# EAGLE board final board v1.0 (EAGLE 9.4.0)
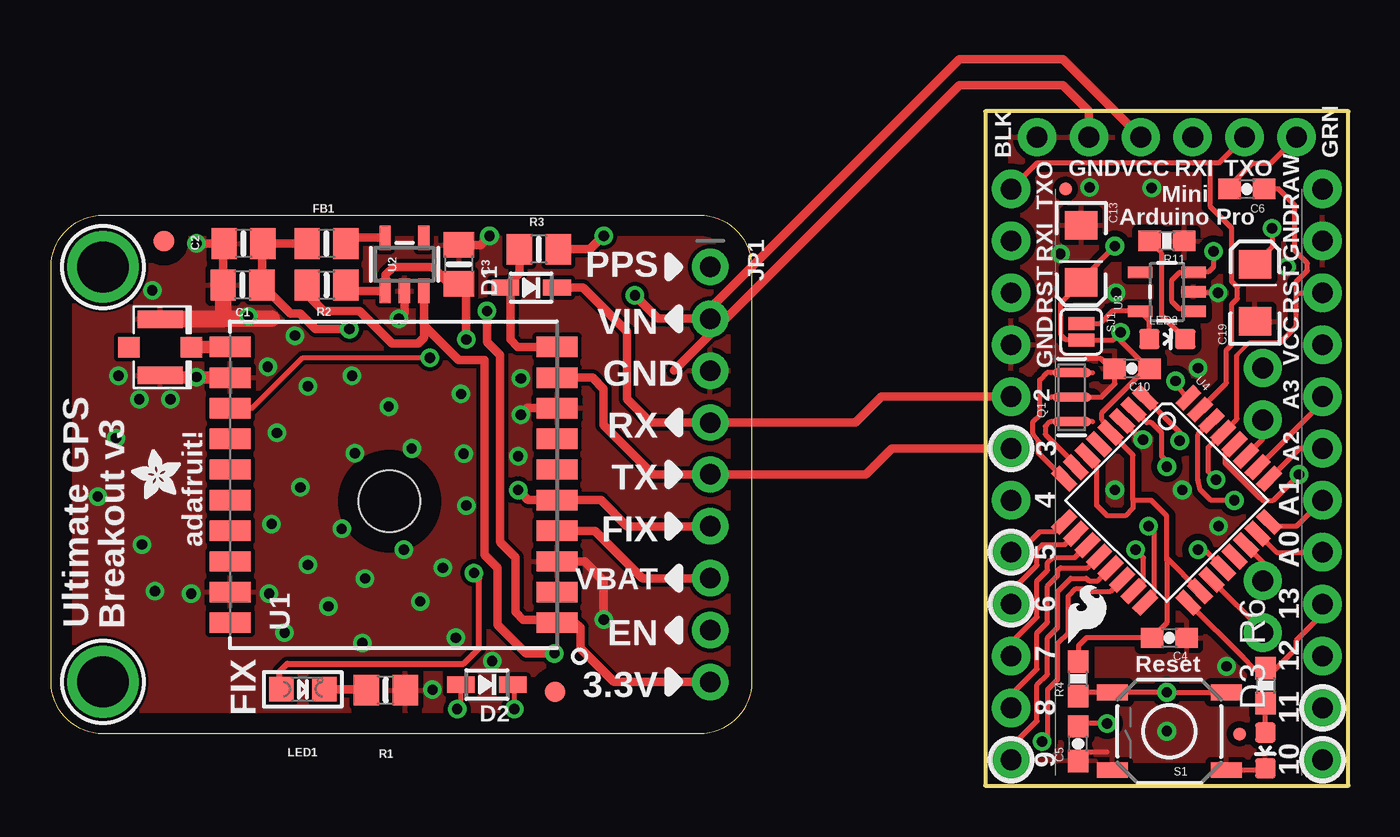
[diagram p0: board, top side]
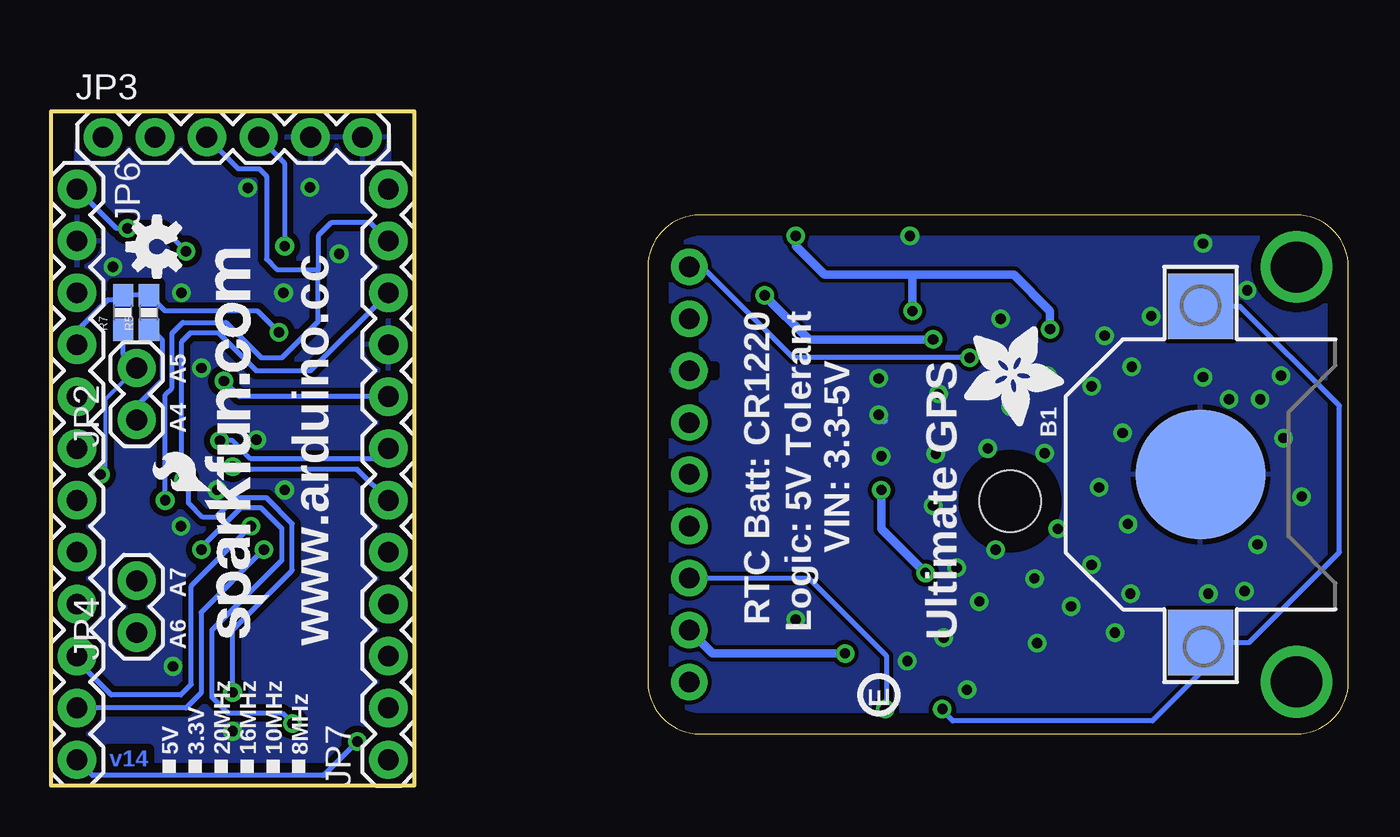
[diagram p1: board, bottom side, seen from below]

Size 63.5 x 33.02 mm. Coordinates in mm from the lower left corner, seen from the top.
Outline: 31.75,2.54 2.54,2.54 arc-90 0,5.08 0,25.4 arc-90 2.54,27.94 31.75,27.94 arc-90 34.29,25.4 34.29,5.08 arc-90 31.75,2.54
Outline: 45.72,33.02 45.72,0 63.5,0 63.5,33.02 45.72,33.02
Copper layers (1*16): Top 0.035mm / dielectric 1.5mm / Bottom 0.035mm
Design rules "default": minimum track width 6mil, minimum drill 0.35mm, track to track 6mil, track to pad 6mil, pad to pad 6mil, via to via 6mil, smd to smd 6mil, copper to edge 40mil, drill to drill 6mil, minimum pad ring 10mil, minimum via ring 8mil, stop-mask expansion 4mil, vias tented up to drill 0mil, thermal gap 10mil
Net classes: 1 vcc: width 0.254 mm
bRestrict: area 31,20.1 to 31.1,20.6; area 32,19 to 32.5,19.2; area 32,21.5 to 32.5,21.6

## Footprints (pad centres in the part's own frame; a part is rotated, then mirrored left to right if it is on the bottom)
CR1220 = smd 3.2 x 3.2: +$1 -8.225,0; +$2 8.225,0 | smd 6.35 x 6.35: - 0,0
0805-NO = smd 1.24 x 1.5: 1 -0.95,0; 2 0.95,0
0603-CAP = smd 1.1 x 1: 1 -0.85,0; 2 0.85,0
EIA3216 = smd 1.4 x 1.6: A 1.4,0; C -1.4,0
SOD-323 = smd 1.35 x 0.8: A 1.27,0; C -1.27,0
0603-LED-ALT1 = smd 1 x 1: A 0,-0.877; C 0,0.877
FIDUCIAL_1MM = smd 1 x 1: 1 0,0
1X09_ROUND_70 = drill 1 pad 1.778: 1 -10.16,0; 2 -7.62,0; 3 -5.08,0; 4 -2.54,0; 5 0,0; 6 2.54,0; 7 5.08,0; 8 7.62,0; 9 10.16,0
1X02 = drill 1.016 pad 1.88: 1 0,0; 2 2.54,0
1X06 = drill 1.016 pad 1.88: 1 0,0; 2 2.54,0; 3 5.08,0; 4 7.62,0; 5 10.16,0; 6 12.7,0
MICRO-FIDUCIAL = smd 0.635 x 0.635: 1 0,0
1X12 = drill 1.016 pad 1.88: 1 0,0; 2 2.54,0; 3 5.08,0; 4 7.62,0; 5 10.16,0; 6 12.7,0; 7 15.24,0; 8 17.78,0; 9 20.32,0; 10 22.86,0; 11 25.4,0; 12 27.94,0
CHIPLED_0805 = smd 1.2 x 1.2: A 0,-1.05; C 0,1.05
RESONATOR-SMD-1:1 = smd 0.45 x 1.905: 1 -1.2,0; 2 0,0; 3 1.2,0
0603-RES = smd 1.1 x 1: 1 -0.85,0; 2 0.85,0
TACTILE-SWITCH-SMD-ALT01 = smd 1.524 x 0.762: 1 -2.794,1.905; 2 2.794,1.905; 3 -2.794,-1.905; 4 2.794,-1.905
SJ_2S = smd 0.635 x 1.27: 1 -0.412,0; 2 0.412,0
FGPMMOPA6H = smd 2 x 1: P$1 -8,6.75; P$2 -8,5.25; P$3 -8,3.75; P$4 -8,2.25; P$5 -8,0.75; P$6 -8,-0.75; P$7 -8,-2.25; P$8 -8,-3.75; P$9 -8,-5.25; P$10 -8,-6.75; P$11 8,-6.75; P$12 8,-5.25; P$13 8,-3.75; P$14 8,-2.25; P$15 8,-0.75; P$16 8,0.75; P$17 8,2.25; P$18 8,3.75; P$19 8,5.25; P$20 8,6.75 | hole 3: 0.2,0.8
SOT23-5 = smd 0.55 x 1.2: 1 -0.95,-1.3; 2 0,-1.3; 3 0.95,-1.3; 4 0.95,1.3; 5 -0.95,1.3
TQFP32-08 = smd 1.27 x 0.559: 1 -4.293,2.8; 2 -4.293,2; 3 -4.293,1.2; 4 -4.293,0.4; 5 -4.293,-0.4; 6 -4.293,-1.2; 7 -4.293,-2; 8 -4.293,-2.8; 17 4.293,-2.8; 18 4.293,-2; 19 4.293,-1.2; 20 4.293,-0.4; 21 4.293,0.4; 22 4.293,1.2; 23 4.293,2; 24 4.293,2.8 | smd 0.559 x 1.27: 9 -2.8,-4.293; 10 -2,-4.293; 11 -1.2,-4.293; 12 -0.4,-4.293; 13 0.4,-4.293; 14 1.2,-4.293; 15 2,-4.293; 16 2.8,-4.293; 25 2.8,4.293; 26 2,4.293; 27 1.2,4.293; 28 0.4,4.293; 29 -0.4,4.293; 30 -1.2,4.293; 31 -2,4.293; 32 -2.8,4.293
MOUNTINGHOLE_2.5_PLATED = drill 2.5 pad 3.2: P$1 0,0
U.FL = smd 2.2 x 0.85: P$1 0,1.375; P$2 0,-1.375 | smd 1.05 x 1: P$3 1.525,0; P$4 -1.525,0

## Placement (x,y rotation side)
B1  CR1220  [CR1220]  7.24,15.24 270 bottom
C1  0.1uF  [0805-NO]  9.37,24.51 180 top
C2  10uF  [0805-NO]  9.42,26.54 180 top
C3  10uF  [0805-NO]  19.96,25.53 90 top
C4  0.1uF  [0603-CAP]  54.74,7.24 180 top
C5  0.1uF  [0603-CAP]  50.27,2.06 90 top
C6  0.1uF  [0603-CAP]  58.52,29.21 180 top
C10  0.1uF  [0603-CAP]  52.91,20.42 180 top
C13  10uF  [EIA3216]  50.42,26.03 270 top
C19  10uF  [EIA3216]  58.93,24.13 90 top
D1  1N4148  [SOD-323]  23.5,24.38 180 top
D2  CUS520  [SOD-323]  21.34,4.95 180 top
D3  Green  [0603-LED-ALT1]  59.44,1.73 180 top
FB1  Ferrite  [0805-NO]  13.49,26.54 180 top
FID1  FIDUCIAL""  [FIDUCIAL_1MM]  5.52,26.67 90 top
FID2  FIDUCIAL""  [FIDUCIAL_1MM]  24.66,4.59 90 top
JP1  [1X09_ROUND_70]  32.26,15.24 270 top
JP2  [1X02]  59.31,17.91 90 bottom
JP3  FTDI Basic  [1X06]  60.96,31.75 0 bottom
JP4  [1X02]  59.31,7.49 90 bottom
JP5  FIDUCIALUFIDUCIAL  [MICRO-FIDUCIAL]  49.66,29.21 0 top
JP6  [1X12]  62.23,29.21 270 bottom
JP7  [1X12]  46.99,1.27 90 bottom
JP8  FIDUCIALUFIDUCIAL  [MICRO-FIDUCIAL]  58.17,2.54 0 top
LED1  RED  [CHIPLED_0805]  12.32,4.72 270 top
LED2  Red  [0603-LED-ALT1]  54.64,21.87 270 top
Q1  8/16/20MHz  [RESONATOR-SMD-1:1]  49.96,19.02 90 top
R1  1K  [0805-NO]  16.38,4.68 180 top
R2  10K  [0805-NO]  13.49,24.51 0 top
R3  10K  [0805-NO]  23.88,26.27 180 top
R4  10K  [0603-RES]  50.27,5.23 90 top
R5  [0603-RES]  58.7,23.16 90 bottom
R6  330  [0603-RES]  59.44,4.9 270 top
R7  [0603-RES]  59.97,23.16 90 bottom
R11  10K  [0603-RES]  54.61,26.67 180 top
S1  Reset  [TACTILE-SWITCH-SMD-ALT01]  54.74,2.67 180 top
SJ1  [SJ_2S]  50.42,22.23 270 top
U1  FGPMMOPA6H  [FGPMMOPA6H]  16.76,14.73 180 top
U2  MIC5225-3.3  [SOT23-5]  17.3,25.53 0 top
U3  MIC5205  [SOT23-5]  54.61,24.18 90 top
U4  ATMEGA328  [TQFP32-08]  54.61,13.97 315 top
U$1  LOGO-SFESK  [SFE-LOGO-FLAME]  49.78,6.98 0 top
U$3  OSHW-LOGOS  [OSHW-LOGO-S]  58.32,26.39 90 bottom
U$8  MOUNTINGHOLE2.5  [MOUNTINGHOLE_2.5_PLATED]  2.54,5.08 90 top
U$9  MOUNTINGHOLE2.5  [MOUNTINGHOLE_2.5_PLATED]  2.54,25.4 90 top
U$11  LOGO-SFENEW  [SFE-NEW-WEBLOGO]  52.83,7.24 90 bottom
U$15  [ADAFRUIT_2.5MM]  6.35,14.03 90 top
U$16  [PCBFEAT-REV-040]  22.99,4.45 270 bottom
U$18  [ADAFRUIT_5MM]  18.8,22.48 270 bottom
U$20  U.FL  [U.FL]  5.33,21.46 0 top

## Library data of the parts
B1 C1-C3 D1 D2 FB1 JP1 LED1 R1-R3 U1 U2 U$15 U$18 U$20 = microbuilder
C4-C6 C10 C13 C19 JP2-JP8 R4-R7 R11 U3 U4 U$1 U$3 U$11 = SparkFun
D3 LED2 Q1 S1 = Testing
FID1 FID2 U$8 U$9 = microbuilder; BOM: EXCLUDE
SJ1 = SparkFun-Passives
U$16 = microbuilder; REV: E

## Nets
1PPS: JP1.1 U1.P$13
3.3V: C1.1 C2.1 FB1.2 JP1.9 R3.1 U1.P$1
A0: JP6.8 U4.23
A1: JP6.7 U4.24
A2: JP6.6 U4.25
A3: JP6.5 U4.26
A4: JP2.1 R5.1 U4.27
A5: JP2.2 R7.1 U4.28
A6: JP4.1 U4.19
A7: JP4.2 U4.22
AREF: C5.2 U4.20
D4: JP7.6 U4.2
D5: JP7.5 U4.9
D6: JP7.4 U4.10
D7: JP7.3 U4.11
D8: JP7.2 U4.12
D9: JP7.1 U4.13
D10: JP6.12 U4.14
DTR: C6.2 JP3.1
ENABLE: JP1.8 R2.1 U2.3
FIX: JP1.6 LED1.A U1.P$5
GND: B1.- C1.2 C2.2 C3.2 JP1.3 R1.1 U1.P$3 U1.P$8 U1.P$12 U1.P$19 U2.2 U$20.P$1 U$20.P$2
GND1 [vcc]: C4.1 C5.1 C10.2 C13.C C19.C D3.C JP3.5 JP3.6 JP6.2 JP7.9 Q1.2 R11.1 S1.1 S1.2 U3.2 U4.3 U4.5 U4.21
MISO: JP6.10 U4.16
MOSI: JP6.11 U4.15
N$1: B1.+$1 B1.+$2 D2.A
N$2: LED1.C R1.2
N$3: FB1.1 U2.5
N$4: U1.P$11 U$20.P$3
N$5: Q1.3 U4.8
N$6: Q1.1 U4.7
N$7: D3.A R6.2
N$8: LED2.A SJ1.1 U3.5
N$9: LED2.C R11.2
RAW [vcc]: C19.A JP6.1 U3.1 U3.3
RESET: C6.1 JP6.3 JP7.10 R4.1 S1.3 S1.4 U4.29
RX: D1.C JP1.4 JP7.8 U4.32
RX_3V: D1.A R3.2 U1.P$10
RXI: JP3.3 JP7.11 U4.30
SCK: JP6.9 R6.1 U4.17
TX: JP1.5 JP7.7 U1.P$9 U4.1
TXO: JP3.2 JP7.12 U4.31
VBACKUP: D2.C JP1.7 U1.P$4
VIN: C3.1 C4.2 C10.1 C13.A JP1.2 JP3.4 JP6.4 R2.2 R4.2 R5.2 R7.2 SJ1.2 U2.1 U4.4 U4.6 U4.18

## Tracks (layer width: path | path; a pad name or v marks a point on that pad's centre or on a via)
1PPS  (via drill 0.5)
  Top 0.254: U1.P$13 9.85,18.48 12.32,20.95 v18.54,20.95
  Bottom 0.254: v18.54,20.95 27.18,20.95 31.62,25.4 JP1.1
3.3V  (via drill 0.5)
  Top 0.406: FB1.2 C2.1 10.32,26.49 C1.1 11.72,23.11 12.19,23.11 12.95,22.35 v14.61,22.35 | JP1.9 27.56,5.08 25.91,6.73 25.91,7.75 25.67,7.98 U1.P$1 24.62,8.13 23.11,8.13 22.73,8.51 22.73,11.18 21.97,11.94 21.97,21.08 21.34,21.72 v21.34,23.24 | R3.1 26.39,26.27 v27.05,26.92
  Bottom 0.406: v27.05,26.92 27.05,26.42 25.65,25.02 21.34,25.02 | 21.34,25.02 16.38,25.02 14.61,23.24 v14.61,22.35 | v21.34,23.24 21.34,25.02
A0
  Top 0.254: 59.98,11.43 JP6.8 | U4.23 59.98,11.43 | 59.98,11.43
A1
  Top 0.254: JP6.7 60.96,12.7 59.69,12.7 59.62,12.77 U4.24
A2
  Top 0.254: U4.25 61.11,16.51 JP6.6
A3
  Top 0.254: 62.23,18.76 JP6.5 62.23,18.76 | U4.26 62.23,18.76
A4
  Top 0.254: 59.31,16.97 JP2.1 | U4.27 59.31,16.97 | 59.31,16.97
  Bottom 0.254: JP2.1 59.31,18.59 58.04,19.86 58.04,21.8 58.7,22.46 | R5.1 58.7,22.46 | 58.7,22.46 58.75,22.52
A5  (via drill 0.51)
  Top 0.254: v61.09,15.24 59.82,13.97 59.31,13.97 59.18,14.1 59.16,14.1 57.45,15.8 57.45,16.25 U4.28
  Bottom 0.203: v61.09,15.24 60.83,15.49 60.83,18.92 JP2.2
  Bottom 0.254: R7.1 59.97,21.11 JP2.2
A6
  Top 0.254: U4.19 59.31,7.57 JP4.1
A7
  Top 0.254: U4.22 59.31,10.97 JP4.2
AREF  (via drill 0.51)
  Top 0.254: 56.46,11.56 v56.13,11.56 56.46,11.56 | v51.69,3.05 50.41,3.05 C5.2 | U4.20 56.46,11.56
  Bottom 0.254: v56.13,11.56 56.13,11.68 54.23,13.59 53.21,13.59 52.2,12.57 52.2,11.05 55.63,7.62 55.63,4.32 54.86,3.56 52.2,3.56 v51.69,3.05
D4  (via drill 0.51)
  Top 0.254: v54.61,15.62 54.86,15.62 54.36,16.13 54.36,17.27 53.85,17.78 53.63,17.78 | U4.2 53.63,17.78 | 53.63,17.78
  Bottom 0.254: JP7.6 48.51,15.49 54.48,15.49 v54.61,15.62
D5
  Top 0.254: U4.9 49.13,12.45 48.39,12.45 47.37,11.43 JP7.5
D6
  Top 0.254: 46.99,9.18 JP7.4 46.99,9.52 48.26,10.79 48.26,11.56 48.51,11.81 49.62,11.81 | U4.10 49.62,11.81 | 49.62,11.81
D7
  Top 0.254: JP7.3 46.99,6.98 48.26,8.25 48.26,10.03 48.77,10.54 48.77,10.92 49.02,11.18 50.12,11.18 U4.11
D8
  Top 0.254: JP7.2 46.99,4.45 48.26,5.71 48.26,7.49 48.77,8 48.77,9.78 49.28,10.29 49.28,10.54 49.4,10.67 50.74,10.67 U4.12
D9
  Top 0.254: JP7.1 46.99,1.91 48.26,3.18 48.26,4.95 48.77,5.46 48.77,7.24 49.28,7.75 49.28,9.52 49.91,10.16 50.67,10.16 50.8,10.03 51.24,10.03 U4.13
D10  (via drill 0.51)
  Top 0.254: v48.51,2.16 48.77,2.41 48.77,4.7 49.28,5.21 49.28,6.98 49.78,7.49 49.78,9.27 50.17,9.65 50.55,9.65 50.67,9.52 51.86,9.52 U4.14
  Bottom 0.254: JP6.12 61.47,0.51 50.17,0.51 v48.51,2.16
DTR
  Top 0.254: JP3.1 59.69,30.48 58.8,30.48 57.67,29.35 C6.2
ENABLE  (via drill 0.5)
  Top 0.406: R2.1 12.57,24.47 12.57,24 13.33,23.24 15.11,23.24 16.7,21.65 17.97,21.65 18.25,21.93 18.25,22.52 | v24.64,6.48 23.24,6.48 21.84,7.87 21.84,10.67 21.21,11.3 21.21,20.83 19.94,20.83 18.25,22.52 | U2.3 18.25,22.52
  Bottom 0.406: v24.64,6.48 31.11,6.48 JP1.8
FIX  (via drill 0.5)
  Top 0.305: 11.18,4.82 11.18,5.59 11.56,5.97 20.19,5.97 20.96,6.73 20.96,10.16 v20.7,10.41
  Top 0.406: JP1.6 28.19,12.7 26.91,13.98 U1.P$5 23.36,13.98 v22.86,14.48 | 11.18,4.82 LED1.A
  Bottom 0.406: v20.7,10.41 22.86,12.57 v22.86,14.48
GND  (via drill 0.5)
  Top 0.406: v7.11,26.54 C2.2 8.42,26.49 C1.2 | U2.2 17.3,23.14 v17.02,22.86 | C3.2 21.02,26.48 v21.46,26.92 | U1.P$8 23.31,18.48 v22.99,18.16 | U1.P$3 26.1,10.98 27.05,10.03 v27.05,8.13 | 5.74,20.07 5.82,20.07 | U$20.P$2 5.33,20.07
  Top 0.61: U1.P$12 5.42,19.98 5.33,20.07 5.74,20.07
  Top 0.813: U$20.P$1 8.42,22.84 8.42,22.86 | 8.42,22.86 C1.2 | 10.79,22.86 8.42,22.86
  Bottom 0.406: v7.11,26.54 6.98,26.54 | v21.46,26.92 21.46,27.05 | v22.99,18.16 22.73,17.91 | v27.05,8.13 27.3,8.13
  other vias: 10.67,9.4 18.67,4.7 11.94,22.03 11.43,7.49 13.57,8.78 14.22,12.57 17.27,11.56 14.73,20.07 16.53,18.56 14.87,16.27 17.65,16.51 10.79,12.81 11.05,17.27 12.57,19.56 12.21,14.6 12.57,10.81 15.37,10.14 19.81,7.24 18.07,9.02 19.18,10.67 22.86,16.13 22.99,19.94 10.6,20.51 5.84,18.92 7.11,20 3.3,20.07 6.86,9.4 4.45,11.81 5.08,9.52 3.18,17.02 2.29,14.16 4.32,18.92 4.95,24.26 9.65,22.99 20.07,19.18 20.32,13.72 20.19,16.26 15.24,6.98 21.59,6.1
  pour Top (isolate 0.203): 34.29,2.54 0.36,2.54 0.36,27.94 34.29,27.94
  pour Bottom (isolate 0.203): 34.29,2.54 0.36,2.54 0.36,27.94 34.29,27.94
GND1  (via drill 0.51)
  Top 0.254: v57.12,24.13 55.88,24.13 | C5.1 50.71,1.65 51.69,1.65 | U4.3 53.39,16.89 53.47,16.89 | 59.04,0.76 S1.1 | 50.98,19.02 51.41,19.02 52.07,19.69 52.07,20.22 51.38,20.9 50.75,20.9 50.72,20.93 | C10.2
  Top 0.406: 30.48,20.32 44.45,34.29 49.53,34.29 50.8,33.02 JP3.5
  other vias: 57.15,12.7 55.37,14.48 54.61,2.67 50.83,29.29 56.13,20.45 52.07,14.48 60.48,25.4 53.44,16.94 49.4,26.03 52.12,24.13 53.87,29.26 57.53,5.84
  pour Top (isolate 0.305): 45.72,33.02 63.5,33.02 63.5,0 45.72,0
  pour Bottom (isolate 0.305): 45.72,33.02 63.5,33.02 63.5,0 45.72,0
MISO  (via drill 0.51)
  Top 0.254: U4.16 53.98,9.38 53.98,12.45 v53.72,12.7
  Bottom 0.254: v53.72,12.7 56.64,9.78 56.64,4.95 57.15,4.45 60.55,4.45 62.23,6.12 JP6.10
MOSI  (via drill 0.51)
  Top 0.254: v53.09,11.56 53.47,11.18 53.47,10 U4.15
  Bottom 0.254: v53.09,11.56 56.16,8.48 56.16,4.55 56.9,3.81 JP6.11
N$1  (via drill 0.5)
  Top 0.254: D2.A 20.07,3.87 19.94,3.75 v19.87,3.75
  Bottom 0.254: B1.+$1 5.3,23.46 0.44,18.6 0.44,11.43 4.86,7.02 B1.+$2 7.24,5.52 9.59,3.18 19.37,3.18 19.87,3.68 v19.87,3.75
N$2
  Top 0.406: LED1.C 15.39,4.72 R1.2
N$3
  Top 0.406: U2.5 14.72,26.83 FB1.1
N$4
  Top 0.406: 7.49,21.46 U$20.P$3 7.11,21.46 7.13,21.48
  Top 0.61: U1.P$11 7.13,21.48
N$5
  Top 0.254: U4.8 48.34,16.28 48.34,16.87 48.06,17.22 48.06,17.83 48.39,18.16 48.39,19.86 48.75,20.23 48.95,20.23
N$6
  Top 0.254: 49.88,15.87 U4.7 50.16,15.7 48.67,17.2 48.67,17.6 48.89,17.83 48.95,17.83
N$7
  Top 0.254: D3.A R6.2
N$8
  Top 0.254: SJ1.1 51.34,22.64 51.93,23.23 U3.5 53.76,22.78 LED2.A
N$9
  Top 0.254: R11.2 54.36,26.07 54.36,23.03 LED2.C
RAW  (via drill 0.51)
  Top 0.254: C19.A 59.77,26.37 v59.77,27.28 | U3.1 55.8,23.34 55.22,23.34 54.86,23.7 54.86,24.77 55.23,25.13 U3.3 55.92,25.15 56.64,25.15 56.9,25.4 v56.9,26.16
  Bottom 0.254: JP6.1 60.3,27.28 v59.77,27.28 58.01,27.28 v56.9,26.16
RESET  (via drill 0.51)
  Top 0.203: 60.2,21.72 58.67,21.72 58.04,21.08
  Top 0.254: 60.96,24.13 JP6.3 | 58.04,21.08 58.04,17.96 U4.29 56.64,16.57 56.64,15.37 v57.02,14.99 | 60.96,24.13 60.96,22.48 60.2,21.72 | 60.96,24.13 60.96,24.69 61.49,25.22 61.49,25.58 60.88,26.19 60.88,28.42 60.1,29.21 C6.1 | S1.3 v54.61,4.57 S1.4 50.46,4.57 R4.1
  Bottom 0.254: v54.61,4.57 54.61,7.62 51.69,10.54 51.69,12.83 52.96,14.1 54.48,14.1 55.44,13.15 56.07,13.15 56.77,13.84 56.77,14.73 v57.02,14.99 57.1,15.06 57.1,21.74 56.67,22.17 55.32,22.17 53.47,20.32 50.8,20.32 JP7.10
RX  (via drill 0.51)
  Top 0.254: U4.32 55.04,19.61 v55.04,19.81
  Top 0.406: D1.C 26.04,24.38 28.19,22.23 28.19,18.92 29.34,17.78 31.75,17.78 JP1.4 39.37,17.78 40.64,19.05 JP7.8
  Bottom 0.254: JP7.8 54.28,19.05 v55.04,19.81
RX_3V
  Top 0.406: U1.P$10 22.84,21.48 22.48,21.84 22.48,24.13 D1.A 22.93,25.09 R3.2
RXI  (via drill 0.51)
  Top 0.254: v57.91,13.97 56.77,13.97 56.26,14.48 56.13,14.99 56.13,17.19 U4.30
  Bottom 0.254: v57.91,13.97 57.91,19.15 57.58,19.48 57.58,22.15 57.05,22.68 54.94,22.68 53.21,20.95 52.2,20.95 50.42,22.73 50.42,25.27 | JP7.11 47.88,27.56 49.78,27.56 50.42,26.92 50.42,25.27 | 50.42,25.27 52.45,25.27 52.96,25.78 52.96,29.84 53.31,30.2 54.33,30.2 JP3.3
SCK
  Top 0.254: JP6.9 62.23,8.38 60.96,7.11 60.96,6.73 59.98,5.75 | 59.91,5.68 59.98,5.75 | U4.17 58.34,6.27 58.87,5.75 | 58.87,5.75 58.94,5.68 | 59.98,5.75 R6.1 58.87,5.75
TX  (via drill 0.51)
  Top 0.254: 55.25,17.3 v55.25,16.89 55.25,17.3 | U4.1 55.25,17.3
  Top 0.406: JP1.5 29.46,15.24 27.05,17.65 27.05,19.43 26.5,19.98 U1.P$9 | 33.02,15.24 JP1.5 | JP1.5 39.88,15.24 41.15,16.51 JP7.7
  Bottom 0.254: JP7.7 47.5,16 53.72,16 54.61,16.89 v55.25,16.89
TXO
  Top 0.254: JP7.12 48.26,30.48 56.74,30.48 | JP3.2 57.15,30.48 56.77,30.48 56.74,30.48 | 57.53,19.72 57.53,21.34 57.78,21.59 57.78,23.57 58.06,23.85 58.06,24.41 57.78,24.69 57.78,27.3 56.74,28.35 56.74,30.48 | U4.31 57.53,19.72 | 57.53,19.72
VBACKUP  (via drill 0.5)
  Top 0.254: D2.C 22.67,4.89 v22.67,3.75
  Top 0.406: JP1.7 28.96,10.16 26.63,12.48 U1.P$4
  Bottom 0.254: JP1.7 26.42,10.16 22.61,6.35 22.61,3.81 v22.67,3.75
VIN  (via drill 0.5, 0.51)
  Top 0.254: 54.61,11.14 54.66,11.09 54.61,11.05 | 54.61,11.05 54.61,11.14 | 54.61,11.14 54.61,13.21 53.85,13.97 52.96,13.97 | 52.96,13.97 52.96,13.59 52.58,13.21 51.69,13.21 51.18,13.72 51.18,15.7 U4.6 | 52.96,13.97 52.96,16.19 U4.4 | 54.61,11.05 54.61,7.96 C4.2 50.67,7.24 50.29,6.86 50.29,6.11 R4.2 | U4.18 54.61,11.14 | v52.07,26.42 50.42,24.77 C13.A 49.4,23.62 49.4,22.1 49.66,21.84 50.39,21.84 SJ1.2 51.96,21.81 v52.35,22.2 52.35,21.77 53.7,20.42 C10.1 53.59,20.42 51.44,18.26 51.44,17.91 51.86,17.49 U4.4 | 51.86,17.31 U4.4
  Top 0.406: R2.2 14.72,24.23 U2.1 16.38,24.26 16.38,25.02 16.76,25.4 18.67,25.4 19.49,24.58 C3.1 20.32,24.22 v20.32,21.84 | v28.57,24 29.72,22.86 JP1.2 32.26,23.37 44.45,35.56 49.53,35.56 JP3.4
  Bottom 0.254: JP6.4 62.23,22.28 60.71,23.8 60.18,23.8 R7.2 R5.2 57.93,23.24 53.39,23.24 v52.35,22.2 | v52.07,26.42 52.07,30.48 JP3.4
  Bottom 0.406: v20.32,21.84 26.42,21.84 v28.57,24

## Text on the board
Bottom: v14
tPlace: BLK | GRN | GND | VCC | RXI | TXO | TXO | Mini | RAW | Arduino Pro | PPS | RXI | GND | VIN | RST | RST | GND | GND | VCC | RX | 2 | A3 | TX | 3 | A2 | FIX | 4 | A1 | adafruit! | VBAT | 5 | A0 | 6 | Ultimate GPS | Breakout v3 | EN | 13 | 3.3V | 7 | Reset | 12 | FIX | 8 | 11 | 9 | 10
bPlace: Logic: 5V Tolerant | RTC Batt: CR1220 | VIN: 3.3-5V | A5 | A4 | Ultimate GPS | A7 | www.arduino.cc | A6 | 8MHz | 10MHz | 16MHz | 20MHz | 3.3V | 5V
tValues: Valid combinations: | 168V / 3.3V Reg / 8MHz | 168 / 5V Reg / 16MHz | 168 / 5V Reg / 20MHz | Mark back accordingly